# Altium PCB 有效值.pcbdoc
Units mil, origin at the board's own origin, x right, y up, seen from the top; angles counter-clockwise.
Board outline 2656 x 2303 mil, 2 copper layers (Top Layer, Bottom Layer); 10 components, 8 nets, 23 pads, 0 vias.
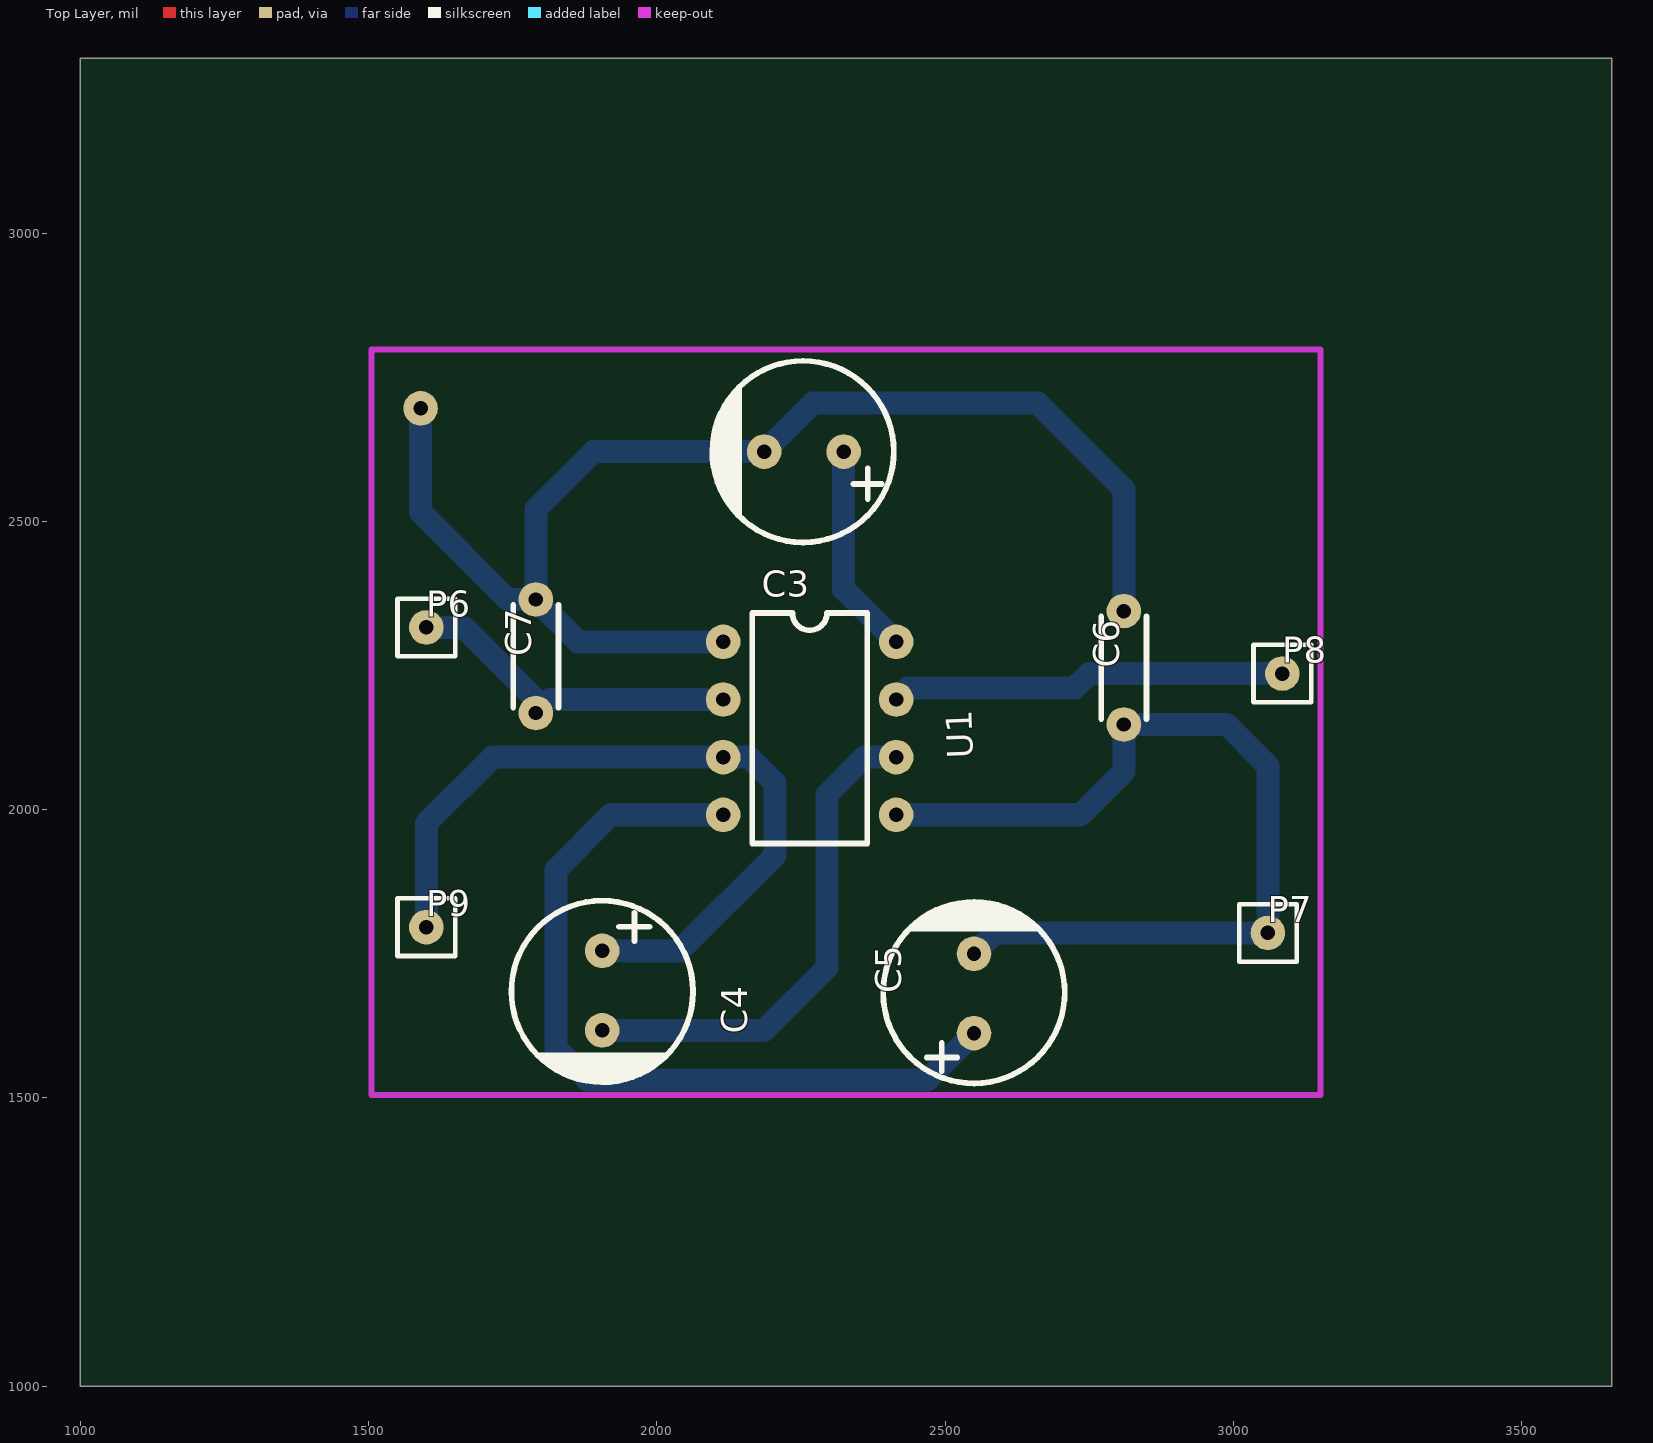
[diagram p0: Top Layer view]
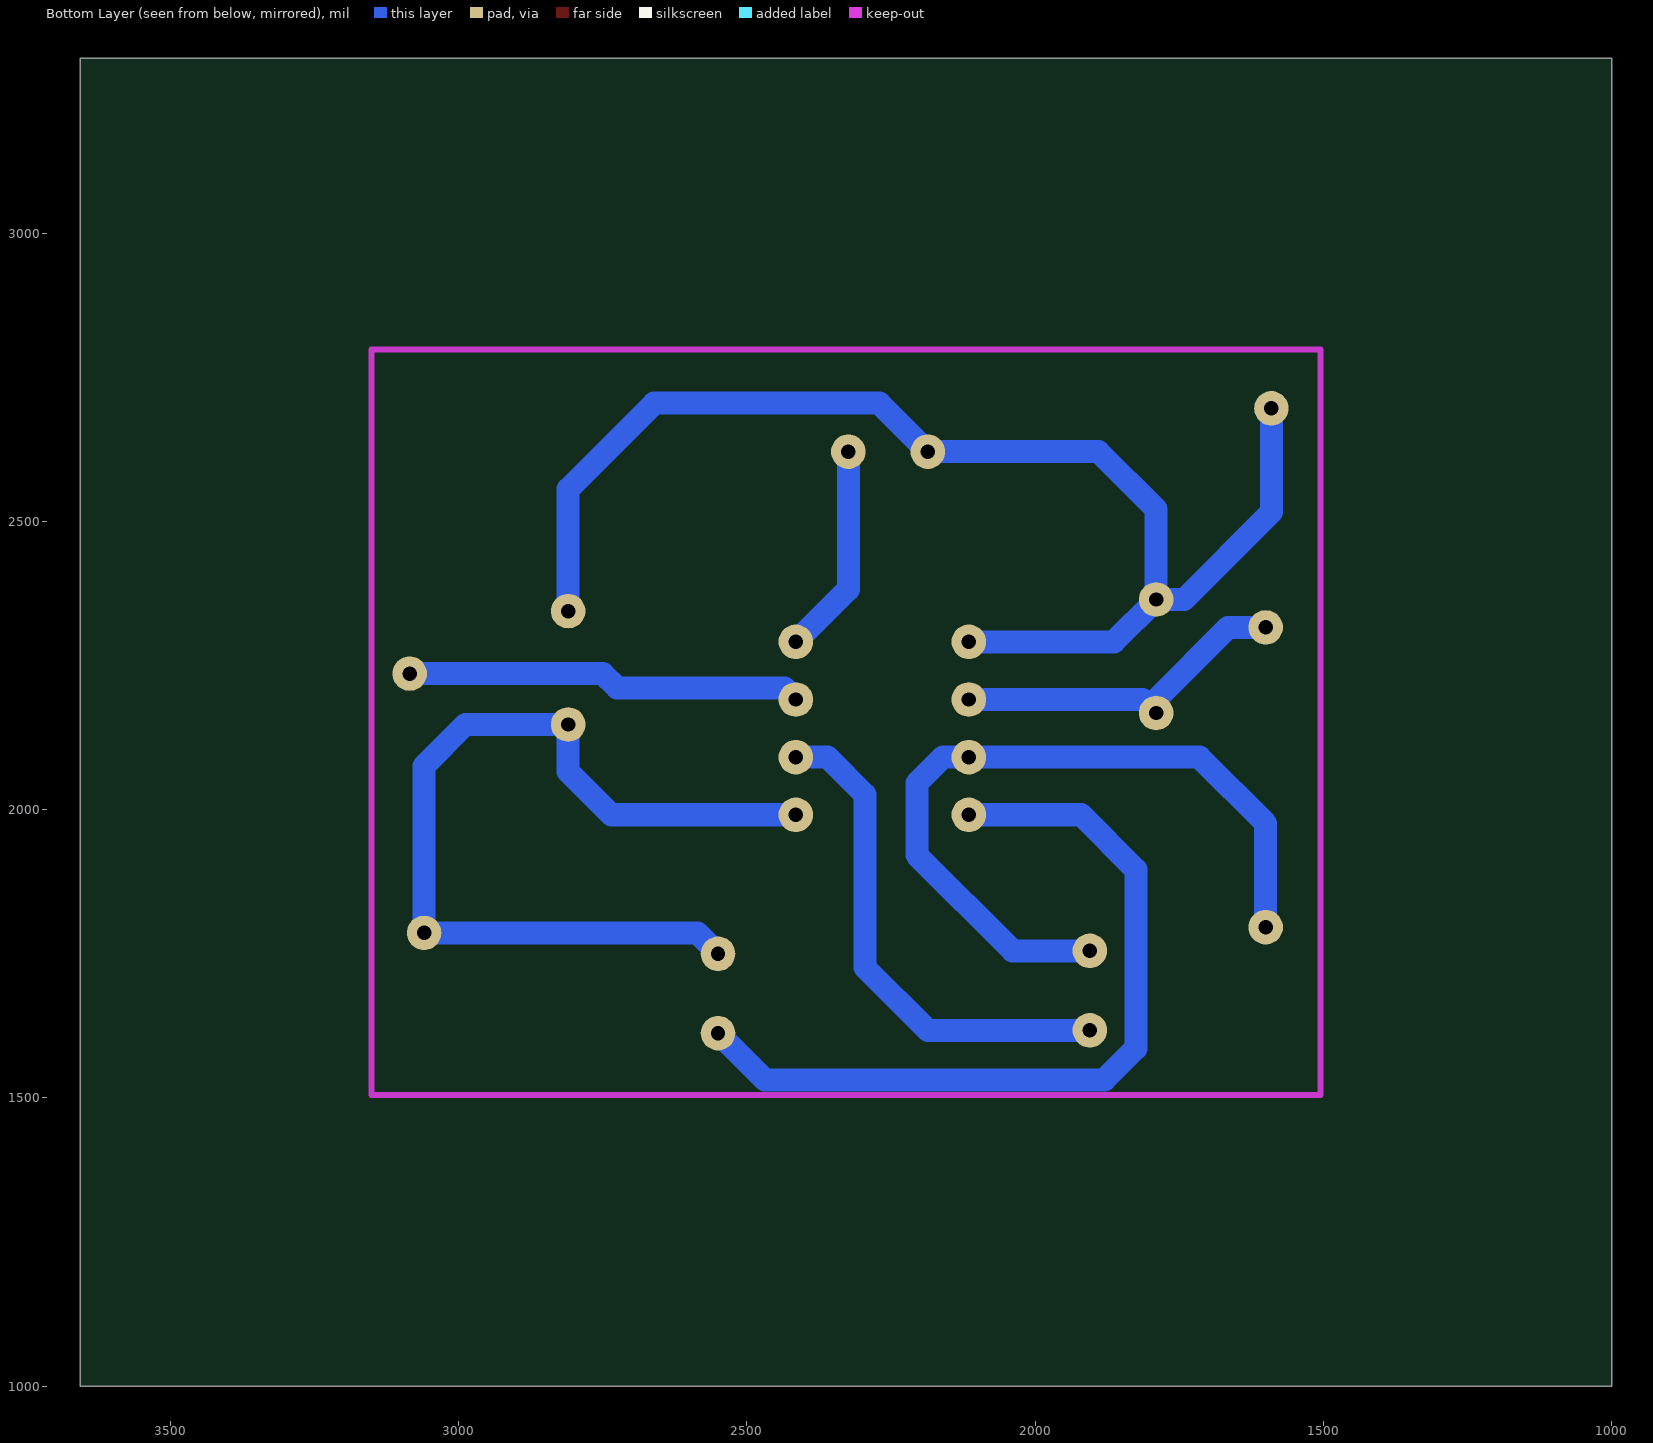
[diagram p1: Bottom Layer view, seen from below]

## Layer stack, top to bottom
Top Solder: solder mask 0.4, Solder Resist, Dk 3.5
Top Layer: signal copper 1.4
Dielectric1: dielectric 12.6, FR-4, Dk 4.8
Bottom Layer: signal copper 1.4
Bottom Solder: solder mask 0.4, Solder Resist, Dk 3.5

## Board outline
3656,1000 1000,1000 1000,3303 3656,3303

## Design rules (kind name [scope] priority, off if disabled: settings)
Clearance [All] p1: gap=10
PolygonConnect [All] p1: connectstyle=Relief reliefconductorwidth=10 reliefentries=4 polygonreliefangle="90 Angle" airgapwidth=10
RoutingVias [All] p1: holewidth=28 width=50 viastyle="Through Hole" minholewidth=28 minwidth=50 maxholewidth=28 maxwidth=50
SolderMaskExpansion [All] p1: expansion=4
Width [All] p1: maxlimit=10 minlimit=10 preferedwidth=10
30 further rules are at their usual default settings.

## Components (designator, comment, footprint, x,y, rotation, side; value= is the part's Value field where it differs from the comment)
C3 "10uF" CAP-TH_BD8.0-P3.50-D1.0-FD 2255,2621 r180 top
C4 "10uF" CAP-TH_BD8.0-P3.50-D1.0-FD 1905,1686 r270 top
C5 "47uF" CAP-TH_BD8.0-P3.50-D1.0-FD 2550,1681 r90 top
C6 "4.7nF" CAP-TH_L5.5-W2.0-P5.00-D1.0 2810,2246 r90 top
C7 "4.7nF" CAP-TH_L5.5-W2.0-P5.00-D1.0 1790,2266 r90 top
P6 "Header-Male-2.54_1x1" HDR-1X1/2.54 1600,2316 r0 top
P7 "Header-Male-2.54_1x1" HDR-1X1/2.54 3060,1786 r0 top
P8 "Header-Male-2.54_1x1" HDR-1X1/2.54 3085,2236 r0 top
P9 "Header-Male-2.54_1x1" HDR-1X1/2.54 1600,1796 r0 top
U1 "LM358NG" DIP-8_L9.7-W6.4-P2.54-LS7.6-BL 2265,2141 r270 top

## Footprints (in the part's own frame and the unit in brackets; to place one, negate y for a bottom-side part, rotate by r counter-clockwise, add the part's x,y. Pads: shape width x height; smd on the part's side, far side on the other; paste and mask are expansions set on the pad)
CAP-TH_BD8.0-P3.50-D1.0-FD [mil]
  round 60 hole 25: 1(-68.9,0) 2(68.9,0)
  silkscreen extent -156,-157 159,157
CAP-TH_L5.5-W2.0-P5.00-D1.0 [mil]
  round 60 hole 25: 1(-98.42,0) 2(98.43,0)
  silkscreen extent -89,-39 89,39
DIP-8_L9.7-W6.4-P2.54-LS7.6-BL [mil]
  round 60 hole 25: 1(-150,-150) 2(-50,-150) 3(50,-150) 4(150,-150) 5(150,150) 6(50,150) 7(-50,150) 8(-150,150)
  silkscreen extent -200,-100 200,100
HDR-1X1/2.54 [mil]
  round 60 hole 25: 1(0,0)
  silkscreen extent -50,-50 50,50

## Free pads (board coordinates)
  round 60 hole 25: 2(1590,2696)

## Nets (pads, with @x,y where several pads share a name; then routed paths per layer and width w, separated by ;. In a path a pad name is that pad's centre, name@x,y a point inside that pad or via, vN(x,y) a via of type N, cw(c..) or ccw(c..) an arc to the next point about the centre after c; other vN are vias at no path point)
C3_1: C3.1 U1.8 | length 367.7
  Bottom Layer w40: C3.1 2323.9,2382.1 U1.8
C4_2: C4.2 U1.6 | length 882
  Bottom Layer w40: C4.2 2186.1,1617.1 2295,1726 2295,2026 2360,2091 U1.6
C5_1: C5.1 U1.4 | length 1420.7
  Bottom Layer w40: U1.4 1920,1991 1825,1896 1825,1586 1880,1531 2468.9,1531 C5.1
C6_1: C5.2 C6.1 P7.1 U1.5 | length 1602.3
  Bottom Layer w40: U1.5 2735,1991 2810,2066 C6.1 2988.42,2147.58 3060,2076 P7.1 2586.1,1786 C5.2
C7_1: C7.1 P6.1 U1.2 | length 599.9
  Bottom Layer w40: P6.1 1665,2316 1790,2191 C7.1 1813.4,2191 U1.2
C7_2: C3.2 C6.2 C7.2 pad.2 U1.1 | length 2324.3
  Bottom Layer w40: pad.2 1590,2516 1741.6,2364.4 C7.2 ; U1.1 1863.4,2291 C7.2 ; C6.2 2810,2556 2661,2705 2270.1,2705 C3.2 1890,2621 1790,2521 C7.2
P8_1: P8.1 U1.7 | length 688.6
  Bottom Layer w40: U1.7 2435,2211 2725,2211 2750,2236 P8.1
P9_1: C4.1 P9.1 U1.3 | length 1345.1
  Bottom Layer w40: P9.1 1600,1976 1715,2091 U1.3 2160,2091 2205,2046 2205,1921 2038.9,1754.9 C4.1

## Silkscreen, mask and mechanical layers (free items; w line width, h text height)
Document:
  lines w0.1: 2327,2150.5 2329,2152.5